# EAGLE board BluePill-Panel (EAGLE 9.6.2), part 1 of 2
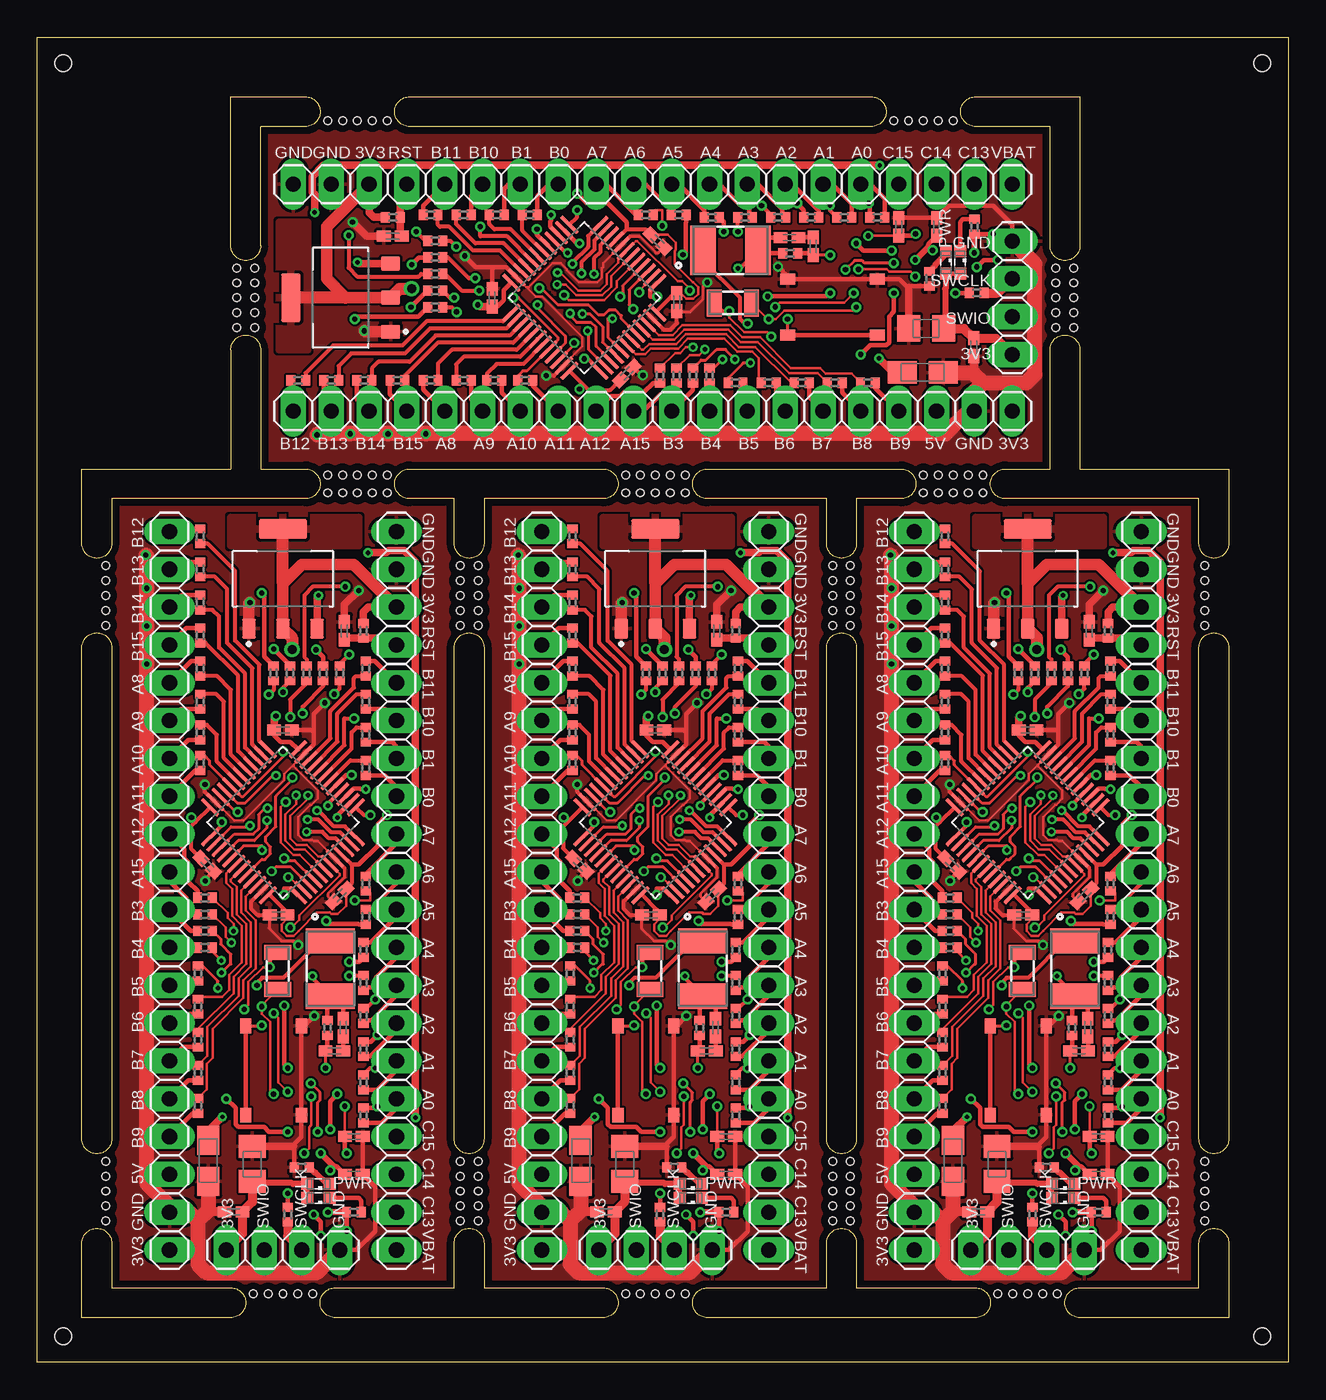
[diagram p0: board, top side]
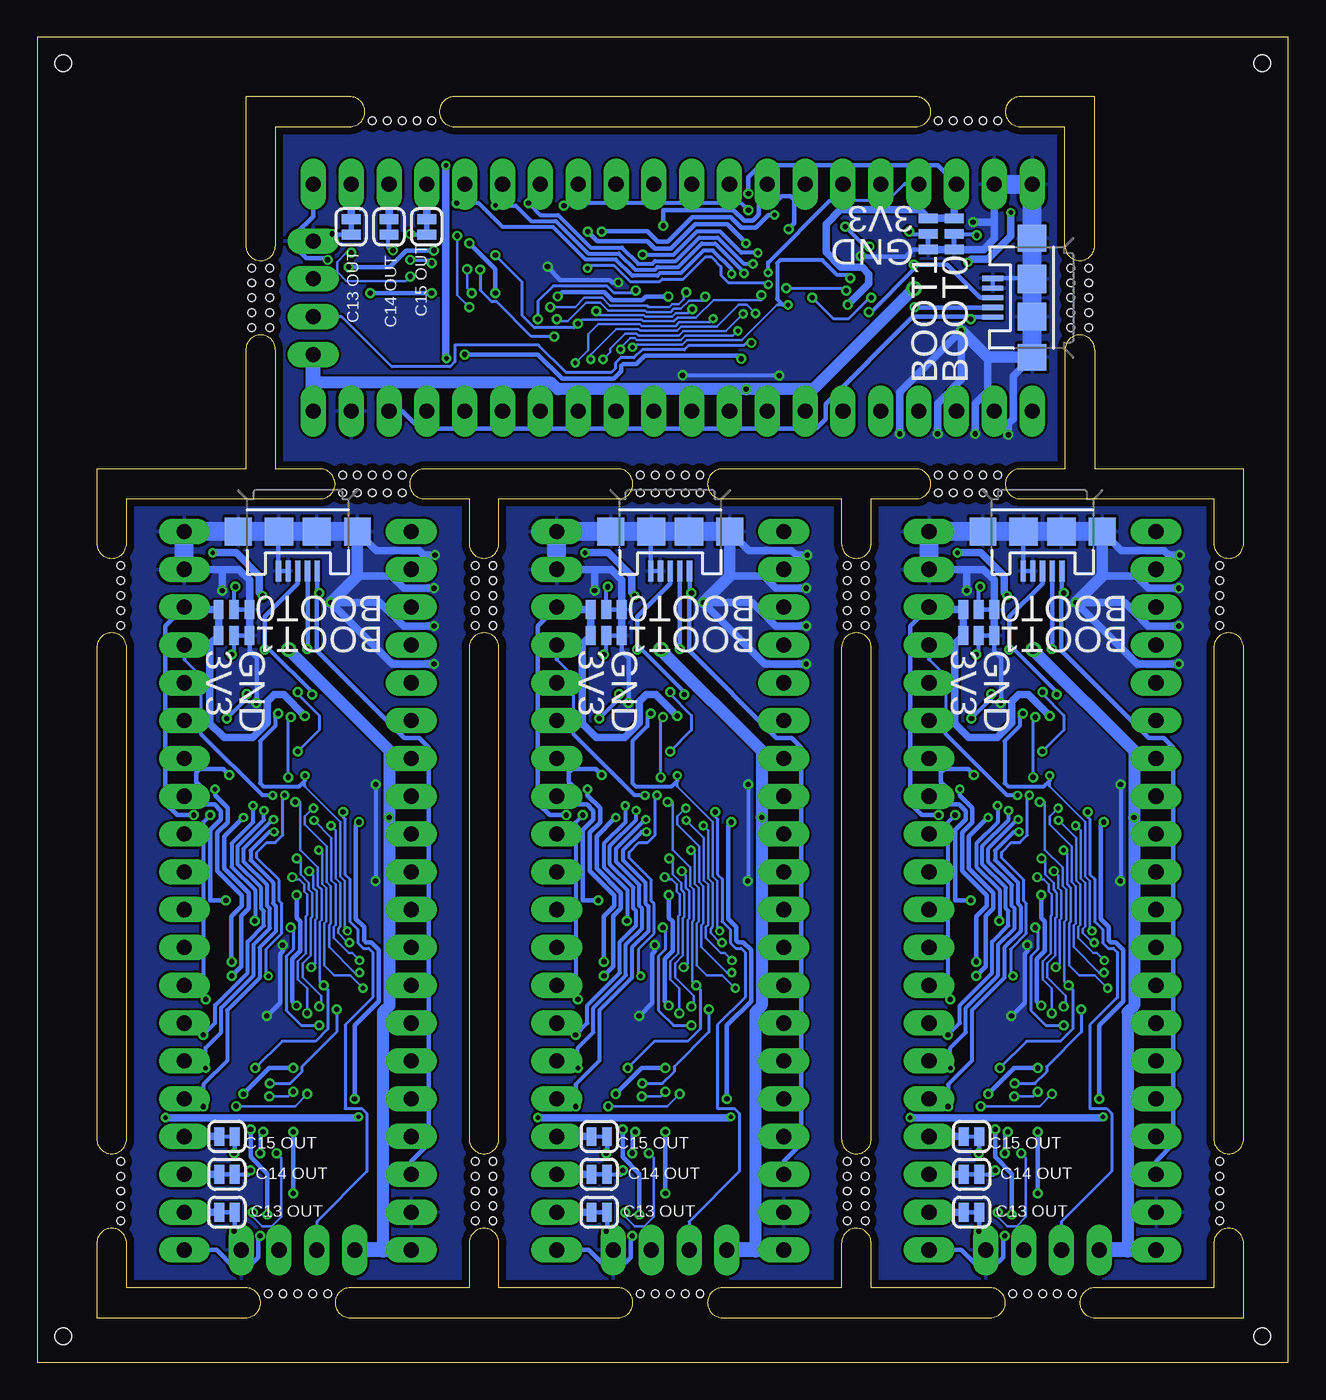
[diagram p1: board, bottom side, seen from below]

Size 84 x 89 mm. Coordinates in mm from the lower left corner, seen from the top.
Outline: 3,55 3,60 13,60 13,68 arc-180 15,68 15,60 18,60 arc-180 18,58 5,58 5,55 arc-180 3,55
Outline: 70,60 80,60 80,55 arc-180 78,55 78,58 65,58 arc-180 65,60 68,60 68,68 arc-180 70,68 70,60
Outline: 0,0 0,89 84,89 84,0 0,0
Outline: 3,48 arc-180 5,48 5,15 arc-180 3,15 3,48
Outline: 3,8 arc-180 5,8 5,5 13,5 arc-180 13,3 3,3 3,8
Outline: 25,83 arc-180 25,85 56,85 arc-180 56,83 25,83
Outline: 18,85 arc-180 18,83 15,83 15,75 arc-180 13,75 13,85 18,85
Outline: 63,83 arc-180 63,85 70,85 70,75 arc-180 68,75 68,83 63,83
Outline: 78,48 arc-180 80,48 80,15 arc-180 78,15 78,48
Outline: 78,8 arc-180 80,8 80,3 70,3 arc-180 70,5 78,5 78,8
Outline: 63,5 arc-180 63,3 45,3 arc-180 45,5 53,5 53,8 arc-180 55,8 55,5 63,5
Outline: 38,5 arc-180 38,3 20,3 arc-180 20,5 28,5 28,8 arc-180 30,8 30,5 38,5
Outline: 45,58 arc-180 45,60 58,60 arc-180 58,58 55,58 55,55 arc-180 53,55 53,58 45,58
Outline: 38,60 arc-180 38,58 30,58 30,55 arc-180 28,55 28,58 25,58 arc-180 25,60 38,60
Outline: 28,48 arc-180 30,48 30,15 arc-180 28,15 28,48
Outline: 53,48 arc-180 55,48 55,15 arc-180 53,15 53,48
Copper layers (1*16): Top 0.035mm / dielectric 1.5mm / Bottom 0.035mm
Design rules "rb": minimum track width 0.15mm, minimum drill 0.3mm, track to track 0.15mm, track to pad 0.15mm, pad to pad 0.15mm, via to via 0.15mm, smd to smd 0.15mm, copper to edge 0.5mm, drill to drill 0.5mm, minimum pad ring 0.16mm, minimum via ring 0.16mm, stop-mask expansion 0.1mm, vias tented up to drill 0.4mm, thermal gap 0.2mm
Holes 1.12 mm at 82.25,87.25 1.75,87.25 1.75,1.75 82.25,1.75
Holes 0.5 mm at 4.6,49.5 4.6,50.5 4.6,51.5 4.6,52.5 4.6,53.5 4.6,9.5 4.6,10.5 4.6,11.5 4.6,12.5 4.6,13.5 19.5,83.4 20.5,83.4 21.5,83.4 22.5,83.4 23.5,83.4 57.5,83.4 58.5,83.4 59.5,83.4 60.5,83.4 61.5,83.4 78.4,53.5 78.4,52.5 78.4,51.5 78.4,50.5 78.4,49.5 78.4,13.5 78.4,12.5 78.4,11.5 78.4,10.5 78.4,9.5 68.5,4.6 67.5,4.6 66.5,4.6 65.5,4.6 64.5,4.6 43.5,4.6 42.5,4.6 41.5,4.6 40.5,4.6 39.5,4.6 18.5,4.6 17.5,4.6 16.5,4.6 15.5,4.6 14.5,4.6 39.5,58.4 40.5,58.4 41.5,58.4 42.5,58.4 43.5,58.4 39.5,59.6 40.5,59.6 41.5,59.6 42.5,59.6 43.5,59.6 19.5,58.4 20.5,58.4 21.5,58.4 22.5,58.4 23.5,58.4 19.5,59.6 20.5,59.6 21.5,59.6 22.5,59.6 23.5,59.6 59.5,58.4 60.5,58.4 61.5,58.4 62.5,58.4 63.5,58.4 59.5,59.6 60.5,59.6 61.5,59.6 62.5,59.6 63.5,59.6 29.6,49.5 29.6,50.5 29.6,51.5 29.6,52.5 29.6,53.5 28.4,49.5 28.4,50.5 28.4,51.5 28.4,52.5 28.4,53.5 54.6,49.5 54.6,50.5 54.6,51.5 54.6,52.5 54.6,53.5 53.4,49.5 53.4,50.5 53.4,51.5 53.4,52.5 53.4,53.5 29.6,9.5 29.6,10.5 29.6,11.5 29.6,12.5 29.6,13.5 28.4,9.5 28.4,10.5 28.4,11.5 28.4,12.5 28.4,13.5 54.6,9.5 54.6,10.5 54.6,11.5 54.6,12.5 54.6,13.5 53.4,9.5 53.4,10.5 53.4,11.5 53.4,12.5 53.4,13.5 69.6,69.5 69.6,70.5 69.6,71.5 69.6,72.5 69.6,73.5 68.4,69.5 68.4,70.5 68.4,71.5 68.4,72.5 68.4,73.5 14.6,69.5 14.6,70.5 14.6,71.5 14.6,72.5 14.6,73.5 13.4,69.5 13.4,70.5 13.4,71.5 13.4,72.5 13.4,73.5

## Footprints (pad centres in the part's own frame; a part is rotated, then mirrored left to right if it is on the bottom)
SMT-JUMPER_3_1-NC_TRACE_NO-SILK = smd 0.66 x 1.27: 1 -1.041,0; 2 0,0; 3 1.041,0
C0402K = smd 0.925 x 0.74: 1 -0.6,0; 2 0.6,0
A/3216-18R = smd 1.95 x 1.5: + 1.375,0; - -1.375,0
R/2012-12R = smd 1.55 x 1.8: + 1.175,0; - -1.175,0
SML0603 = smd 0.8 x 0.8: A 0.75,0; C -0.75,0
USB-MICROB = smd 1.4 x 0.35: D+ -2.65,0; D- -2.65,-0.65; GND -2.65,1.3; ID -2.65,0.65; VBUS -2.65,-1.3 | smd 1.9 x 1.8: MT1 0,-4; MT2 0,4 | smd 1.9 x 1.9: P$1 0,-1.27; P$2 0,1.27
1X20 = drill 1.016 long: 1 -24.13,0; 2 -21.59,0; 3 -19.05,0; 4 -16.51,0; 5 -13.97,0; 6 -11.43,0; 7 -8.89,0; 8 -6.35,0; 9 -3.81,0; 10 -1.27,0; 11 1.27,0; 12 3.81,0; 13 6.35,0; 14 8.89,0; 15 11.43,0; 16 13.97,0; 17 16.51,0; 18 19.05,0; 19 21.59,0; 20 24.13,0
1X04 = drill 1.016 long: 1 -3.81,0; 2 -1.27,0; 3 1.27,0; 4 3.81,0
SMT-JUMPER_2_NC_TRACE_SILK = smd 0.66 x 1.27: 1 -0.521,0; 2 0.521,0
3.2X1.5 = smd 1 x 1.8: 1 -1.25,0; 2 1.25,0
5.0X3.2_2 = smd 1.7 x 3.3: 1 -1.85,0; 2 1.85,0
R0402 = smd 0.6 x 0.7: 1 -0.5,0; 2 0.5,0
QFP50P900X900X160-48N = smd 1.56 x 0.28: 1 -4.18,2.75; 2 -4.18,2.25; 3 -4.18,1.75; 4 -4.18,1.25; 5 -4.18,0.75; 6 -4.18,0.25; 7 -4.18,-0.25; 8 -4.18,-0.75; 9 -4.18,-1.25; 10 -4.18,-1.75; 11 -4.18,-2.25; 12 -4.18,-2.75; 25 4.18,-2.75; 26 4.18,-2.25; 27 4.18,-1.75; 28 4.18,-1.25; 29 4.18,-0.75; 30 4.18,-0.25; 31 4.18,0.25; 32 4.18,0.75; 33 4.18,1.25; 34 4.18,1.75; 35 4.18,2.25; 36 4.18,2.75 | smd 0.28 x 1.56: 13 -2.75,-4.18; 14 -2.25,-4.18; 15 -1.75,-4.18; 16 -1.25,-4.18; 17 -0.75,-4.18; 18 -0.25,-4.18; 19 0.25,-4.18; 20 0.75,-4.18; 21 1.25,-4.18; 22 1.75,-4.18; 23 2.25,-4.18; 24 2.75,-4.18; 37 2.75,4.18; 38 2.25,4.18; 39 1.75,4.18; 40 1.25,4.18; 41 0.75,4.18; 42 0.25,4.18; 43 -0.25,4.18; 44 -0.75,4.18; 45 -1.25,4.18; 46 -1.75,4.18; 47 -2.25,4.18; 48 -2.75,4.18
SOT229P700X180-4N = smd 0.93 x 1.31: 1 -2.29,-3.345; 2 0,-3.345; 3 2.29,-3.345 | smd 3.24 x 1.31: 4 0,3.345
TS-1187A-B-A-B = smd 1 x 0.75: A -3,1.875; B 3,1.875; C -3,-1.875; D 3,-1.875

## Placement (x,y rotation side)
BOOT0  JUMPER-SMT_3_1-NC_TRACE_NO-SILK  [SMT-JUMPER_3_1-NC_TRACE_NO-SILK]  20.79,50.56 0 bottom
BOOT1  JUMPER-SMT_3_1-NC_TRACE_NO-SILK  [SMT-JUMPER_3_1-NC_TRACE_NO-SILK]  20.79,48.81 0 bottom
BOOT2  JUMPER-SMT_3_1-NC_TRACE_NO-SILK  [SMT-JUMPER_3_1-NC_TRACE_NO-SILK]  45.79,50.56 0 bottom
BOOT3  JUMPER-SMT_3_1-NC_TRACE_NO-SILK  [SMT-JUMPER_3_1-NC_TRACE_NO-SILK]  45.79,48.81 0 bottom
BOOT4  JUMPER-SMT_3_1-NC_TRACE_NO-SILK  [SMT-JUMPER_3_1-NC_TRACE_NO-SILK]  70.79,50.56 0 bottom
BOOT5  JUMPER-SMT_3_1-NC_TRACE_NO-SILK  [SMT-JUMPER_3_1-NC_TRACE_NO-SILK]  70.79,48.81 0 bottom
BOOT6  JUMPER-SMT_3_1-NC_TRACE_NO-SILK  [SMT-JUMPER_3_1-NC_TRACE_NO-SILK]  22.44,75.79 270 bottom
BOOT7  JUMPER-SMT_3_1-NC_TRACE_NO-SILK  [SMT-JUMPER_3_1-NC_TRACE_NO-SILK]  24.18,75.79 270 bottom
C1  1uF  [C0402K]  20.63,49.13 90 top
C2  10uF  [A/3216-18R]  11.48,13.54 90 top
C3  22uF  [R/2012-12R]  14.44,13.32 270 top
C4  100nF  [C0402K]  16.5,42.47 180 top
C5  100nF  [C0402K]  16.2,30.06 0 top
C6  100nF  [C0402K]  20.31,31.35 45 top
C7  100nF  [C0402K]  11.42,33.42 135 top
C8  100nF  [C0402K]  13.18,10.12 0 top
C9  20pF  [C0402K]  19.96,20.91 180 top
C10  20pF  [C0402K]  20.54,22.49 270 top
C11  20pF  [C0402K]  21.26,12.62 180 top
C12  20pF  [C0402K]  21.26,15.16 0 top
C13  GREEN  [SML0603]  18.88,11.03 180 top
C14  1uF  [C0402K]  45.63,49.13 90 top
C15  22uF  [R/2012-12R]  39.44,13.32 270 top
C16  10uF  [A/3216-18R]  36.49,13.54 90 top
C17  100nF  [C0402K]  41.5,42.47 180 top
C18  100nF  [C0402K]  41.2,30.06 0 top
C19  100nF  [C0402K]  45.31,31.35 45 top
C20  100nF  [C0402K]  36.42,33.42 135 top
C21  100nF  [C0402K]  38.18,10.12 0 top
C22  20pF  [C0402K]  44.96,20.91 180 top
C23  20pF  [C0402K]  45.54,22.49 270 top
C24  20pF  [C0402K]  46.26,12.62 180 top
C25  20pF  [C0402K]  46.26,15.16 0 top
C26  GREEN  [SML0603]  43.88,11.03 180 top
C27  1uF  [C0402K]  70.63,49.13 90 top
C28  22uF  [R/2012-12R]  64.44,13.32 270 top
C29  10uF  [A/3216-18R]  61.48,13.54 90 top
C30  100nF  [C0402K]  66.5,42.47 180 top
C31  100nF  [C0402K]  66.2,30.06 0 top
C32  100nF  [C0402K]  70.31,31.35 45 top
C33  100nF  [C0402K]  61.42,33.42 135 top
C34  100nF  [C0402K]  63.18,10.12 0 top
C35  20pF  [C0402K]  69.96,20.91 180 top
C36  20pF  [C0402K]  70.54,22.49 270 top
C37  20pF  [C0402K]  71.26,12.62 180 top
C38  20pF  [C0402K]  71.26,15.16 0 top
C39  GREEN  [SML0603]  68.88,11.03 180 top
C40  1uF  [C0402K]  23.87,75.63 180 top
C41  22uF  [R/2012-12R]  59.68,69.44 0 top
C42  10uF  [A/3216-18R]  59.46,66.49 180 top
C43  100nF  [C0402K]  30.54,71.5 270 top
C44  100nF  [C0402K]  42.94,71.2 90 top
C45  100nF  [C0402K]  41.65,75.31 135 top
C46  100nF  [C0402K]  39.58,66.42 225 top
C47  100nF  [C0402K]  62.88,68.18 90 top
C48  20pF  [C0402K]  52.09,74.96 270 top
C49  20pF  [C0402K]  50.51,75.54 0 top
C50  20pF  [C0402K]  60.38,76.26 270 top
C51  20pF  [C0402K]  57.84,76.26 90 top
C52  GREEN  [SML0603]  61.97,73.88 270 top
J1  [USB-MICROB]  16.5,55.8 90 bottom
J2  [USB-MICROB]  41.5,55.8 90 bottom
J3  [USB-MICROB]  66.5,55.8 90 bottom
J4  [USB-MICROB]  17.2,71.5 0 bottom
JP1  [1X20]  8.88,31.67 90 top
JP2  [1X20]  24.12,31.67 90 top
JP3  [1X04]  16.5,7.54 0 top
JP4  JUMPER-SMT_2_NC_TRACE_SILK  [SMT-JUMPER_2_NC_TRACE_SILK]  21.26,10.08 180 bottom
JP5  [1X20]  33.88,31.67 90 top
JP6  [1X20]  49.12,31.67 90 top
JP7  JUMPER-SMT_2_NC_TRACE_SILK  [SMT-JUMPER_2_NC_TRACE_SILK]  21.26,12.62 180 bottom
JP8  JUMPER-SMT_2_NC_TRACE_SILK  [SMT-JUMPER_2_NC_TRACE_SILK]  21.26,15.16 180 bottom
JP9  [1X04]  41.5,7.54 0 top
JP10  JUMPER-SMT_2_NC_TRACE_SILK  [SMT-JUMPER_2_NC_TRACE_SILK]  46.26,10.08 180 bottom
JP11  JUMPER-SMT_2_NC_TRACE_SILK  [SMT-JUMPER_2_NC_TRACE_SILK]  46.26,12.62 180 bottom
JP12  JUMPER-SMT_2_NC_TRACE_SILK  [SMT-JUMPER_2_NC_TRACE_SILK]  46.26,15.16 180 bottom
JP13  [1X20]  58.88,31.67 90 top
JP14  [1X20]  74.12,31.67 90 top
JP15  [1X04]  66.5,7.54 0 top
JP16  JUMPER-SMT_2_NC_TRACE_SILK  [SMT-JUMPER_2_NC_TRACE_SILK]  71.26,10.08 180 bottom
JP17  JUMPER-SMT_2_NC_TRACE_SILK  [SMT-JUMPER_2_NC_TRACE_SILK]  71.26,12.62 180 bottom
JP18  JUMPER-SMT_2_NC_TRACE_SILK  [SMT-JUMPER_2_NC_TRACE_SILK]  71.26,15.16 180 bottom
JP19  [1X20]  41.33,63.88 180 top
JP20  [1X20]  41.33,79.12 180 top
JP21  [1X04]  65.46,71.5 90 top
JP22  JUMPER-SMT_2_NC_TRACE_SILK  [SMT-JUMPER_2_NC_TRACE_SILK]  62.92,76.26 90 bottom
JP23  JUMPER-SMT_2_NC_TRACE_SILK  [SMT-JUMPER_2_NC_TRACE_SILK]  60.38,76.26 90 bottom
JP24  JUMPER-SMT_2_NC_TRACE_SILK  [SMT-JUMPER_2_NC_TRACE_SILK]  57.84,76.26 90 bottom
PWR  RED  [SML0603]  18.88,11.98 180 top
PWR1  RED  [SML0603]  43.88,11.98 180 top
PWR2  RED  [SML0603]  68.88,11.98 180 top
PWR3  RED  [SML0603]  61.02,73.88 270 top
Q1  32.768kHz  [3.2X1.5]  16.15,26.29 90 top
Q2  8MHz  [5.0X3.2_2]  19.68,26.45 90 top
Q3  32.768kHz  [3.2X1.5]  41.15,26.29 90 top
Q4  8MHz  [5.0X3.2_2]  44.68,26.45 90 top
Q5  32.768kHz  [3.2X1.5]  66.15,26.29 90 top
Q6  8MHz  [5.0X3.2_2]  69.68,26.45 90 top
Q7  32.768kHz  [3.2X1.5]  46.71,71.15 180 top
Q8  8MHz  [5.0X3.2_2]  46.55,74.68 180 top
R1  220  [R0402]  22.06,39.92 270 top
R2  220  [R0402]  22.06,42.15 270 top
R3  10k  [R0402]  21.9,49.13 270 top
R4  220  [R0402]  11.26,28.97 180 top
R5  220  [R0402]  11.26,27.86 180 top
R6  220  [R0402]  10.79,26.11 270 top
R7  220  [R0402]  10.79,23.89 270 top
R8  220  [R0402]  10.79,21.67 270 top
R9  220  [R0402]  10.79,19.45 270 top
R10  220  [R0402]  10.79,17.22 270 top
R11  220  [R0402]  22.06,44.37 270 top
R12  220  [R0402]  22.06,46.59 90 top
R13  220  [R0402]  10.94,55.48 90 top
R14  220  [R0402]  10.94,53.26 90 top
R15  220  [R0402]  10.94,51.04 90 top
R16  220  [R0402]  10.94,48.81 90 top
R17  220  [R0402]  21.9,16.59 90 top
R18  220  [R0402]  21.9,18.81 90 top
R19  220  [R0402]  21.9,21.03 90 top
R20  220  [R0402]  21.9,23.26 90 top
R21  220  [R0402]  21.9,25.48 90 top
R22  220  [R0402]  21.9,27.7 270 top
R23  220  [R0402]  22.06,29.92 270 top
R24  220  [R0402]  22.06,32.15 270 top
R25  220  [R0402]  10.94,46.59 270 top
R26  220  [R0402]  10.94,44.37 90 top
R27  220  [R0402]  10.94,42.31 90 top
R28  220  [R0402]  10.94,40.24 90 top
R29  220  [R0402]  11.26,31.19 0 top
R30  1M  [R0402]  19.48,22.45 270 top
R31  220  [R0402]  16.82,9.92 90 top
R32  220  [R0402]  11.26,30.08 0 top
R33  100k  [R0402]  18.09,46.27 90 top
R34  100k  [R0402]  20.31,46.27 270 top
R35  20  [R0402]  19.2,46.27 90 top
R36  20  [R0402]  16.98,46.27 90 top
R37  4k7  [R0402]  15.87,46.27 90 top
R38  1k  [R0402]  17.77,13.1 180 top
R39  1k  [R0402]  21.26,10.08 180 top
R40  220  [R0402]  47.06,39.92 270 top
R41  220  [R0402]  47.06,42.15 270 top
R42  220  [R0402]  36.26,28.97 180 top
R43  220  [R0402]  36.26,27.86 180 top
R44  220  [R0402]  35.79,26.11 270 top
R45  220  [R0402]  35.79,23.89 270 top
R46  220  [R0402]  35.79,21.67 270 top
R47  220  [R0402]  35.79,19.45 270 top
R48  220  [R0402]  35.79,17.22 270 top
R49  220  [R0402]  47.06,44.37 270 top
R50  220  [R0402]  47.06,46.59 90 top
R51  220  [R0402]  35.95,55.48 90 top
R52  220  [R0402]  35.95,53.26 90 top
R53  220  [R0402]  35.95,51.04 90 top
R54  220  [R0402]  35.95,48.81 90 top
R55  220  [R0402]  46.9,16.59 90 top
R56  220  [R0402]  46.9,18.81 90 top
R57  220  [R0402]  46.9,21.03 90 top
R58  220  [R0402]  46.9,23.26 90 top
R59  220  [R0402]  46.9,25.48 90 top
R60  220  [R0402]  46.9,27.7 270 top
R61  220  [R0402]  47.06,29.92 270 top
R62  220  [R0402]  47.06,32.15 270 top
R63  220  [R0402]  35.95,46.59 270 top
R64  220  [R0402]  35.95,44.37 90 top
R65  220  [R0402]  35.95,42.31 90 top
R66  220  [R0402]  35.95,40.24 90 top
R67  220  [R0402]  36.26,31.19 0 top
R68  220  [R0402]  41.82,9.92 90 top
R69  220  [R0402]  36.26,30.08 0 top
R70  100k  [R0402]  43.09,46.27 90 top
R71  100k  [R0402]  45.31,46.27 270 top
R72  10k  [R0402]  46.9,49.13 270 top
R73  20  [R0402]  44.2,46.27 90 top
R74  20  [R0402]  41.98,46.27 90 top
R75  4k7  [R0402]  40.87,46.27 90 top
R76  1M  [R0402]  44.48,22.45 270 top
R77  1k  [R0402]  42.77,13.1 180 top
R78  1k  [R0402]  46.26,10.08 180 top
R79  220  [R0402]  72.06,39.92 270 top
R80  220  [R0402]  72.06,42.15 270 top
R81  220  [R0402]  61.26,28.97 180 top
R82  220  [R0402]  61.26,27.86 180 top
R83  220  [R0402]  60.79,26.11 270 top
R84  220  [R0402]  60.79,23.89 270 top
R85  220  [R0402]  60.79,21.67 270 top
R86  220  [R0402]  60.79,19.45 270 top
R87  220  [R0402]  60.79,17.22 270 top
R88  220  [R0402]  72.06,44.37 270 top
R89  220  [R0402]  72.06,46.59 90 top
R90  220  [R0402]  60.94,55.48 90 top
R91  220  [R0402]  60.94,53.26 90 top
R92  220  [R0402]  60.94,51.04 90 top
R93  220  [R0402]  60.94,48.81 90 top
R94  220  [R0402]  71.9,16.59 90 top
R95  220  [R0402]  71.9,18.81 90 top
R96  220  [R0402]  71.9,21.03 90 top
R97  220  [R0402]  71.9,23.26 90 top
R98  220  [R0402]  71.9,25.48 90 top
R99  220  [R0402]  71.9,27.7 270 top
R100  220  [R0402]  72.06,29.92 270 top
R101  220  [R0402]  72.06,32.15 270 top
R102  220  [R0402]  60.94,46.59 270 top
R103  220  [R0402]  60.94,44.37 90 top
R104  220  [R0402]  60.94,42.31 90 top
R105  220  [R0402]  60.94,40.24 90 top
R106  220  [R0402]  61.26,31.19 0 top
R107  220  [R0402]  66.82,9.92 90 top
R108  220  [R0402]  61.26,30.08 0 top
R109  100k  [R0402]  68.09,46.27 90 top
R110  100k  [R0402]  70.31,46.27 270 top
R111  10k  [R0402]  71.9,49.13 270 top
R112  20  [R0402]  69.2,46.27 90 top
R113  20  [R0402]  66.98,46.27 90 top
R114  4k7  [R0402]  65.87,46.27 90 top
R115  1M  [R0402]  69.48,22.45 270 top
R116  1k  [R0402]  67.77,13.1 180 top
R117  1k  [R0402]  71.26,10.08 180 top
R118  220  [R0402]  33.08,77.06 0 top
R119  220  [R0402]  30.85,77.06 0 top
R120  220  [R0402]  44.03,66.26 270 top
R121  220  [R0402]  45.14,66.26 270 top
R122  220  [R0402]  46.89,65.79 0 top
R123  220  [R0402]  49.11,65.79 0 top
R124  220  [R0402]  51.33,65.79 0 top
R125  220  [R0402]  53.55,65.79 0 top
R126  220  [R0402]  55.78,65.79 0 top
R127  220  [R0402]  28.63,77.06 0 top
R128  220  [R0402]  26.41,77.06 180 top
R129  220  [R0402]  17.52,65.95 180 top
R130  220  [R0402]  19.74,65.95 180 top
R131  220  [R0402]  21.96,65.95 180 top
R132  220  [R0402]  24.18,65.95 180 top
R133  220  [R0402]  56.41,76.9 180 top
R134  220  [R0402]  54.19,76.9 180 top
R135  220  [R0402]  51.97,76.9 180 top
R136  220  [R0402]  49.74,76.9 180 top
R137  220  [R0402]  47.52,76.9 180 top
R138  220  [R0402]  45.3,76.9 0 top
R139  220  [R0402]  43.08,77.06 0 top
R140  220  [R0402]  40.85,77.06 0 top
R141  220  [R0402]  26.41,65.95 0 top
R142  220  [R0402]  28.63,65.95 180 top
R143  220  [R0402]  30.69,65.95 180 top
R144  220  [R0402]  32.76,65.95 180 top
R145  220  [R0402]  41.81,66.26 90 top
R146  220  [R0402]  63.08,71.82 180 top
R147  220  [R0402]  42.92,66.26 90 top
R148  100k  [R0402]  26.73,73.09 180 top
R149  100k  [R0402]  26.73,75.31 0 top
R150  10k  [R0402]  23.87,76.9 0 top
R151  20  [R0402]  26.73,74.2 180 top
R152  20  [R0402]  26.73,71.98 180 top
R153  4k7  [R0402]  26.73,70.87 180 top
R154  1M  [R0402]  50.55,74.48 0 top
R155  1k  [R0402]  59.9,72.77 270 top
R156  1k  [R0402]  62.92,76.26 270 top
U1  STM32F103C8T6  [QFP50P900X900X160-48N]  16.5,36.26 135 top
U2  AMS1117-3.3  [SOT229P700X180-4N]  16.5,52.62 0 top
U3  STM32F103C8T6  [QFP50P900X900X160-48N]  41.5,36.26 135 top
U4  AMS1117-3.3  [SOT229P700X180-4N]  41.5,52.62 0 top
U5  STM32F103C8T6  [QFP50P900X900X160-48N]  66.5,36.26 135 top
U6  AMS1117-3.3  [SOT229P700X180-4N]  66.5,52.62 0 top
U7  STM32F103C8T6  [QFP50P900X900X160-48N]  36.74,71.5 225 top
U8  AMS1117-3.3  [SOT229P700X180-4N]  20.38,71.5 90 top
U$1  TACTILE-SWITCH  [TS-1187A-B-A-B]  15.87,19.61 90 top
U$2  TACTILE-SWITCH  [TS-1187A-B-A-B]  40.87,19.61 90 top
U$3  TACTILE-SWITCH  [TS-1187A-B-A-B]  65.87,19.61 90 top
U$4  TACTILE-SWITCH  [TS-1187A-B-A-B]  53.4,70.87 180 top

## Library data of the parts
BOOT0 BOOT1-BOOT7 JP4 JP7 JP8 JP10-JP12 JP16-JP18 JP22-JP24 = SparkFun-Jumpers
C1 C6-C12 C14 C19-C25 C27 C32-C38 C40 C45-C51 = rcl; LCSC: C52923; SPICEPREFIX: C
C2 C16 C29 C42 = rcl; LCSC: C7171; SPICEPREFIX: C
C3 C15 C28 C41 = rcl; LCSC: C147776; SPICEPREFIX: C
C4 C5 C17 C18 C30 C31 C43 C44 = rcl; LCSC: C1525; SPICEPREFIX: C
C13 C26 C39 C52 = led; LCSC: C72043
J1-J4 = SparkFun-Connectors; PROD_ID: CONN-09505; SF_ID: PRT-08533
JP1-JP3 JP5 JP6 JP9 JP13-JP15 JP19-JP21 = pinhead
PWR PWR1-PWR3 = led; LCSC: C2286
Q1 Q3 Q5 Q7 = crystal-geyer_V1_0; LCSC: C32346
Q2 Q4 Q6 Q8 = crystal-geyer_V1_0; LCSC: C115962
R1 R2 R4-R29 R31 R32 R40-R69 R79-R108 R118-R147 = rcl; LCSC: C25091; SPICEPREFIX: R
R3 R72 R111 R150 = rcl; LCSC: C25744; SPICEPREFIX: R
R30 R76 R115 R154 = rcl; LCSC: C26083; SPICEPREFIX: R
R33 R34 R70 R71 R109 R110 R148 R149 = rcl; LCSC: C25741; SPICEPREFIX: R
R35 R36 R73 R74 R112 R113 R151 R152 = rcl; LCSC: C4109; SPICEPREFIX: R
R37 R75 R114 R153 = rcl; LCSC: C25900; SPICEPREFIX: R
R38 R39 R77 R78 R116 R117 R155 R156 = rcl; LCSC: C11702; SPICEPREFIX: R
U1 U3 U5 U7 = STM32F103C8T6; AVAILABILITY: Good; DESCRIPTION: ARM® Cortex®-M3 STM32F1 Microcontroller IC 32-Bit 72MHz 64KB (64K x 8) FLASH 48-LQFP (7x7); DIGIKEY-PURCHASE-URL: https://snapeda.com/shop?store=DigiKey&id=52195; LCSC: C8734; MF: STMicroelectronics; MOUSER-PURCHASE-URL: https://snapeda.com/shop?store=Mouser&id=52195; MP: STM32F103C8T6; PACKAGE: LQFP-48 STMicroelectronics; PRICE: None
U2 U4 U6 U8 = AMS1117-3.3; AVAILABILITY: Unavailable; DESCRIPTION: Sot223/Pkg 1-Amp 3.3-Volt Low Drop Out Voltage Regulatator; LCSC: C6186; MF: Advanced Monolithic Systems; MP: AMS1117-3.3; PACKAGE: None; PRICE: None
U$1-U$4 = tactile; LCSC: C318884

## Nets
+3V1: BOOT2.1 BOOT3.1 C15.+ C17.2 C18.2 C19.2 C20.2 C21.2 C26.A JP5.1 JP6.18 JP9.1 PWR1.A R72.1 U3.9 U3.24 U3.36 U3.48 U4.2 U4.4
+3V2: BOOT4.1 BOOT5.1 C28.+ C30.2 C31.2 C32.2 C33.2 C34.2 C39.A JP13.1 JP14.18 JP15.1 PWR2.A R111.1 U5.9 U5.24 U5.36 U5.48 U6.2 U6.4
+3V3: BOOT0.1 BOOT1.1 C3.+ C4.2 C5.2 C6.2 C7.2 C8.2 C13.A JP1.1 JP2.18 JP3.1 PWR.A R3.1 U1.9 U1.24 U1.36 U1.48 U2.2 U2.4
+3V4: BOOT6.1 BOOT7.1 C41.+ C43.2 C44.2 C45.2 C46.2 C47.2 C52.A JP19.1 JP20.18 JP21.1 PWR3.A R150.1 U7.9 U7.24 U7.36 U7.48 U8.2 U8.4
+5V: J1.VBUS JP1.3 R37.2
+5V1: J2.VBUS JP5.3 R75.2
+5V2: J3.VBUS JP13.3 R114.2
+5V3: J4.VBUS JP19.3 R153.2
A0: JP2.5 R17.1
A1: JP2.6 R18.1
A2: JP2.7 R19.1
A3: JP2.8 R20.1
A4: JP2.9 R21.1
A5: JP2.10 R22.1
A6: JP2.11 R23.1
A7: JP2.12 R24.1
A8: JP1.16 R25.1
A9: JP1.15 R26.1
A10: JP1.14 R27.1
A11: JP1.13 R28.1
A12: JP1.12 R29.1
A13: JP6.5 R55.1
A14: JP6.7 R57.1
A15: JP1.11 R32.1
A16: JP6.9 R59.1
A17: JP6.11 R61.1
A18: JP5.16 R63.1
A19: JP5.14 R65.1
A20: JP5.12 R67.1
A21: JP6.6 R56.1
A22: JP6.8 R58.1
A23: JP6.10 R60.1
A24: JP6.12 R62.1
A25: JP5.15 R64.1
A26: JP5.13 R66.1
A27: JP5.11 R69.1
A28: JP14.5 R94.1
A29: JP14.7 R96.1
A30: JP14.9 R98.1
A31: JP14.11 R100.1
A32: JP13.16 R102.1
A33: JP13.14 R104.1
A34: JP13.12 R106.1
A35: JP14.6 R95.1
A36: JP14.8 R97.1
A37: JP14.10 R99.1
A38: JP14.12 R101.1
A39: JP13.15 R103.1
A40: JP13.13 R105.1
A41: JP13.11 R108.1
A42: JP20.5 R133.1
A43: JP20.7 R135.1
A44: JP20.9 R137.1
A45: JP20.11 R139.1
A46: JP19.16 R141.1
A47: JP19.14 R143.1
A48: JP19.12 R145.1
A49: JP20.6 R134.1
A50: JP20.8 R136.1
A51: JP20.10 R138.1
A52: JP20.12 R140.1
A53: JP19.15 R142.1
A54: JP19.13 R144.1
A55: JP19.11 R147.1
B0: JP2.13 R1.2
B1: JP2.14 R2.2
B2: JP6.13 R40.2
B3: JP1.10 R4.2
B4: JP1.9 R5.2
B5: JP1.8 R6.2
B6: JP1.7 R7.2
B7: JP1.6 R8.2
B8: JP1.5 R9.2
B9: JP1.4 R10.2
B10: JP2.15 R11.2
B11: JP2.16 R12.2
B12: JP1.20 R13.2
B13: JP1.19 R14.2
B14: JP1.18 R15.2
B15: JP1.17 R16.2
B16: JP6.14 R41.2
B17: JP5.10 R42.2
B18: JP5.9 R43.2
B19: JP5.7 R45.2
B20: JP5.8 R44.2
B21: JP5.6 R46.2
B22: JP5.5 R47.2
B23: JP6.15 R49.2
B24: JP5.4 R48.2
B25: JP5.20 R51.2
B26: JP6.16 R50.2
B27: JP5.19 R52.2
B28: JP5.18 R53.2
B29: JP5.17 R54.2
B30: JP14.13 R79.2
B31: JP14.14 R80.2
B32: JP13.10 R81.2
B33: JP13.9 R82.2
B34: JP13.7 R84.2
B35: JP13.8 R83.2
B36: JP13.6 R85.2
B37: JP13.5 R86.2
B38: JP14.15 R88.2
B39: JP13.4 R87.2
B40: JP13.20 R90.2
B41: JP14.16 R89.2
B42: JP13.19 R91.2
B43: JP13.18 R92.2
B44: JP13.17 R93.2
B45: JP20.13 R118.2
B46: JP20.14 R119.2
B47: JP19.10 R120.2
B48: JP19.9 R121.2
B49: JP19.7 R123.2
B50: JP19.8 R122.2
B51: JP19.6 R124.2
B52: JP19.5 R125.2
B53: JP20.15 R127.2
B54: JP19.4 R126.2
B55: JP19.20 R129.2
B56: JP20.16 R128.2
B57: JP19.19 R130.2
B58: JP19.18 R131.2
B59: JP19.17 R132.2
BOOT0: R33.1 U1.44
BOOT1: R34.2 U1.20
BOOT2: R70.1 U3.44
BOOT3: R71.2 U3.20
BOOT4: R109.1 U5.44
BOOT5: R110.2 U5.20
BOOT6: R148.1 U7.44
BOOT7: R149.2 U7.20
C1: JP6.4 JP12.2
C2: JP6.2 JP10.2
C3: JP6.3 JP11.2
C4: JP14.4 JP18.2
C5: JP14.2 JP16.2
C6: JP14.3 JP17.2
C7: JP20.4 JP24.2
C8: JP20.2 JP22.2
C9: JP20.3 JP23.2
C13: JP2.2 JP4.2
C14: JP2.3 JP7.2
C15: JP2.4 JP8.2
GND: BOOT0.3 BOOT1.3 C1.2 C2.- C3.- C4.1 C5.1 C6.1 C7.1 C8.1 C11.1 C12.2 J1.GND J1.ID J1.MT1 J1.MT2 J1.P$1 J1.P$2 JP1.2 JP2.19 JP2.20 JP3.4 R38.2 U1.8 U1.23 U1.35 U1.47 U2.1 U$1.C U$1.D
GND1: BOOT2.3 BOOT3.3 C14.2 C15.- C16.- C17.1 C18.1 C19.1 C20.1 C21.1 C24.1 C25.2 J2.GND J2.ID J2.MT1 J2.MT2 J2.P$1 J2.P$2 JP5.2 JP6.19 JP6.20 JP9.4 R77.2 U3.8 U3.23 U3.35 U3.47 U4.1 U$2.C U$2.D
GND2: BOOT4.3 BOOT5.3 C27.2 C28.- C29.- C30.1 C31.1 C32.1 C33.1 C34.1 C37.1 C38.2 J3.GND J3.ID J3.MT1 J3.MT2 J3.P$1 J3.P$2 JP13.2 JP14.19 JP14.20 JP15.4 R116.2 U5.8 U5.23 U5.35 U5.47 U6.1 U$3.C U$3.D
GND3: BOOT6.3 BOOT7.3 C40.2 C41.- C42.- C43.1 C44.1 C45.1 C46.1 C47.1 C50.1 C51.2 J4.GND J4.ID J4.MT1 J4.MT2 J4.P$1 J4.P$2 JP19.2 JP20.19 JP20.20 JP21.4 R155.2 U7.8 U7.23 U7.35 U7.47 U8.1 U$4.C U$4.D
N$1: BOOT0.2 R33.2
N$2: BOOT1.2 R34.1
N$3: R1.1 U1.18
N$4: R2.1 U1.19
N$5: C9.1 C10.2
N$6: R4.1 U1.39
N$7: R5.1 U1.40
N$8: R6.1 U1.41
N$9: R7.1 U1.42
N$10: R8.1 U1.43
N$11: R9.1 U1.45
N$12: R10.1 U1.46
N$13: R11.1 U1.21
N$14: R12.1 U1.22
N$15: R13.1 U1.25
N$16: R14.1 U1.26
N$17: R15.1 U1.27
N$18: R16.1 U1.28
N$19: PWR.C R38.1
N$20: C13.C R39.1
N$21: R40.1 U3.18
N$22: R41.1 U3.19
N$23: R42.1 U3.39
N$24: R43.1 U3.40
N$25: J1.D- R36.2
N$26: R17.2 U1.10
N$27: R18.2 U1.11
N$28: R19.2 U1.12
N$29: R20.2 U1.13
N$30: R21.2 U1.14
N$31: R22.2 U1.15
N$32: R23.2 U1.16
N$33: R24.2 U1.17
N$34: R25.2 U1.29
N$35: R26.2 U1.30
N$36: R27.2 U1.31
N$37: R44.1 U3.41
N$38: R45.1 U3.42
N$39: R46.1 U3.43
N$40: R31.2 U1.37
N$41: R32.2 U1.38
N$42: R47.1 U3.45
N$43: R48.1 U3.46
N$44: R49.1 U3.21
N$45: J1.D+ R35.2 R37.1
N$46: R50.1 U3.22
N$47: R51.1 U3.25
N$48: R52.1 U3.26
N$49: R53.1 U3.27
N$50: R54.1 U3.28
N$51: R55.2 U3.10
N$52: R56.2 U3.11
N$53: R57.2 U3.12
N$54: R58.2 U3.13
N$55: R59.2 U3.14
N$56: R60.2 U3.15
N$57: R61.2 U3.16
N$58: R62.2 U3.17
N$59: R63.2 U3.29
N$60: R64.2 U3.30
N$61: R65.2 U3.31
N$62: R68.2 U3.37
N$63: R69.2 U3.38
N$64: BOOT2.2 R70.2
N$65: BOOT3.2 R71.1
N$66: J2.D- R74.2
N$67: J2.D+ R73.2 R75.1
N$68: C22.1 C23.2
N$69: PWR1.C R77.1
N$70: C26.C R78.1
N$71: R79.1 U5.18
N$72: R80.1 U5.19
N$73: R81.1 U5.39
N$74: R82.1 U5.40
N$75: R83.1 U5.41
N$76: R84.1 U5.42
N$77: R85.1 U5.43
N$78: R86.1 U5.45
N$79: R87.1 U5.46
N$80: R88.1 U5.21
N$81: R89.1 U5.22
N$82: R90.1 U5.25
N$83: R91.1 U5.26
N$84: R92.1 U5.27
N$85: R93.1 U5.28
N$86: R94.2 U5.10
N$87: R95.2 U5.11
N$88: R96.2 U5.12
N$89: R97.2 U5.13
N$90: R98.2 U5.14
N$91: R99.2 U5.15
N$92: R100.2 U5.16
N$93: R101.2 U5.17
N$94: R102.2 U5.29
N$95: R103.2 U5.30
N$96: R104.2 U5.31
N$97: R107.2 U5.37
N$98: R108.2 U5.38
N$99: BOOT4.2 R109.2
N$100: BOOT5.2 R110.1
N$101: J3.D- R113.2
N$102: J3.D+ R112.2 R114.1
N$103: C35.1 C36.2
N$104: PWR2.C R116.1
N$105: C39.C R117.1
N$106: R118.1 U7.18
N$107: R119.1 U7.19
N$108: R120.1 U7.39
N$109: R121.1 U7.40
N$110: R122.1 U7.41
N$111: R123.1 U7.42
N$112: R124.1 U7.43
N$113: R125.1 U7.45
N$114: R126.1 U7.46
N$115: R127.1 U7.21
N$116: R128.1 U7.22
N$117: R129.1 U7.25
N$118: R130.1 U7.26
N$119: R131.1 U7.27
N$120: R132.1 U7.28
N$121: R133.2 U7.10
N$122: R134.2 U7.11
N$123: R135.2 U7.12
N$124: R136.2 U7.13
N$125: R137.2 U7.14
N$126: R138.2 U7.15
N$127: R139.2 U7.16
N$128: R140.2 U7.17
N$129: R141.2 U7.29
N$130: R142.2 U7.30
N$131: R143.2 U7.31
N$132: R146.2 U7.37
N$133: R147.2 U7.38
N$134: BOOT6.2 R148.2
N$135: BOOT7.2 R149.1
N$136: J4.D- R152.2
N$137: J4.D+ R151.2 R153.1
N$138: C48.1 C49.2
N$139: PWR3.C R155.1
N$140: C52.C R156.1
PA1: R66.2 R74.1 U3.32
PA2: R67.2 R73.1 U3.33
PA3: R105.2 R113.1 U5.32
PA4: R106.2 R112.1 U5.33
PA5: R144.2 R152.1 U7.32
PA6: R145.2 R151.1 U7.33
PA11: R28.2 R36.1 U1.32
PA12: R29.2 R35.1 U1.33
PC1: JP10.1 R78.2 U3.2
PC2: C24.2 JP11.1 Q3.2 U3.3
PC3: C25.1 JP12.1 Q3.1 U3.4
PC4: JP16.1 R117.2 U5.2
PC5: C37.2 JP17.1 Q5.2 U5.3
PC6: C38.1 JP18.1 Q5.1 U5.4
PC7: JP22.1 R156.2 U7.2
PC8: C50.2 JP23.1 Q7.2 U7.3
PC9: C51.1 JP24.1 Q7.1 U7.4
PC13: JP4.1 R39.2 U1.2
PC14: C11.2 JP7.1 Q1.2 U1.3
PC15: C12.1 JP8.1 Q1.1 U1.4
PD0: C9.2 Q2.2 R30.2 U1.5
PD1: C10.1 Q2.1 R30.1 U1.6
PD2: C22.2 Q4.2 R76.2 U3.5
PD3: C23.1 Q4.1 R76.1 U3.6
PD4: C35.2 Q6.2 R115.2 U5.5
PD5: C36.1 Q6.1 R115.1 U5.6
PD6: C48.2 Q8.2 R154.2 U7.5
PD7: C49.1 Q8.1 R154.1 U7.6
RESET: C1.1 JP2.17 R3.2 U1.7 U$1.A U$1.B
RESET1: C14.1 JP6.17 R72.2 U3.7 U$2.A U$2.B
RESET2: C27.1 JP14.17 R111.2 U5.7 U$3.A U$3.B
RESET3: C40.1 JP20.17 R150.2 U7.7 U$4.A U$4.B
SWCLK: JP3.3 R31.1
SWCLK1: JP9.3 R68.1
SWCLK2: JP15.3 R107.1
SWCLK3: JP21.3 R146.1
SWIO: JP3.2 U1.34
SWIO1: JP9.2 U3.34
SWIO2: JP15.2 U5.34
SWIO3: JP21.2 U7.34
VBAT: JP2.1 U1.1
VBAT1: JP6.1 U3.1
VBAT2: JP14.1 U5.1
VBAT3: JP20.1 U7.1
VCC: C2.+ U2.3
VCC1: C16.+ U4.3
VCC2: C29.+ U6.3
VCC3: C42.+ U8.3

## Tracks (layer width: path | path; a pad name or v marks a point on that pad's centre or on a via)
+3V1  (via drill 0.35, 0.6)
  Top 0.152: C18.2 41.8,29.8 41.43,29.43 41.43,28.96 41.76,28.63 42.22,28.63 42.55,28.96 42.55,28.99 43.77,30.21 44.64,30.21 44.73,30.11 45.18,30.11 45.74,30.67 C19.2
  Top 0.203: 35.61,36.29 35.61,36.33 v35.36,36.59
  Top 0.254: U3.9 46.11,33.43 46.11,32.15 C19.2 | U3.48 40.65,31.36 41.61,30.4 41.49,30.4 41.49,30.38 C18.2 | U3.36 35.61,36.29 35.31,35.98 35.31,34.53 C20.2 | C15.+ 39.54,12.04
  Top 0.305: U3.24 42.01,41.67 41.34,41.67 40.9,42.11 C17.2 | PWR1.A C26.A | 46.11,33.43 46.59,33.43 47.85,34.69 47.85,36.12 v48.48,36.75
  Top 0.406: PWR1.A 42.16,11.98 42.1,12.04 39.54,12.04
  Top 0.508: R72.1 46.9,50.4 47.22,50.72 JP6.18 | C17.2 40.9,43.29 v41.03,43.42
  Top 0.61: C15.+ 39.44,10.78 C21.2 38.78,8.63 JP9.1
  Top 0.762: U4.2 41.5,52.31 42.77,53.58 46.27,53.58 JP6.18
  Top 0.813: U4.2 42.11,48.67 v42.11,47.87 | 41.5,52.31 U4.4
  Bottom 0.305: v48.48,36.75 49.6,36.75 50.39,37.54 50.39,49.45 JP6.18
  Bottom 0.508: JP6.18 48.96,50.56 BOOT2.1 BOOT3.1 47.4,48.24 47.4,42.91 46.45,41.96 44.55,41.96 43.57,42.94 43.57,44.38 43.1,44.85 42.45,44.85 v41.03,43.42
  Bottom 0.813: v42.11,47.87 41.92,47.67 41.92,47.65 35.36,41.09 v35.36,36.59 35.36,23.95 35.79,23.52 35.79,7.54
  Bottom 1.016: JP5.1 35.79,7.54 JP9.1
  pour Top: 38.01,54.85 46.58,54.85 46.58,56.75 38.01,56.75
+3V2  (via drill 0.35, 0.6)
  Top 0.152: C31.2 66.8,29.8 66.43,29.43 66.43,28.96 66.76,28.63 67.22,28.63 67.55,28.96 67.55,28.99 68.77,30.21 69.64,30.21 69.73,30.11 70.18,30.11 70.73,30.67 C32.2
  Top 0.203: 60.61,36.29 60.61,36.33 v60.36,36.59
  Top 0.254: U5.9 71.11,33.43 71.11,32.15 C32.2 | U5.48 65.65,31.36 66.61,30.4 66.48,30.4 66.48,30.38 C31.2 | U5.36 60.61,36.29 60.31,35.98 60.31,34.53 C33.2 | C28.+ 64.54,12.04
  Top 0.305: U5.24 67,41.67 66.34,41.67 65.9,42.11 C30.2 | PWR2.A C39.A | 71.11,33.43 71.59,33.43 72.85,34.69 72.85,36.12 v73.48,36.75
  Top 0.406: PWR2.A 67.16,11.98 67.1,12.04 64.54,12.04
  Top 0.508: R111.1 71.9,50.4 72.22,50.72 JP14.18 | C30.2 65.9,43.29 v66.03,43.42
  Top 0.61: C28.+ 64.44,10.78 C34.2 63.78,8.63 JP15.1
  Top 0.762: U6.2 66.5,52.31 67.77,53.58 71.26,53.58 JP14.18
  Top 0.813: U6.2 67.11,48.67 v67.11,47.87 | 66.5,52.31 U6.4
  Bottom 0.305: v73.48,36.75 74.6,36.75 75.39,37.54 75.39,49.45 JP14.18
  Bottom 0.508: JP14.18 73.96,50.56 BOOT4.1 BOOT5.1 72.4,48.24 72.4,42.91 71.45,41.96 69.55,41.96 68.56,42.94 68.56,44.38 68.1,44.85 67.45,44.85 v66.03,43.42
  Bottom 0.813: v67.11,47.87 66.92,47.67 66.92,47.65 60.36,41.09 v60.36,36.59 60.36,23.95 60.79,23.52 60.79,7.54
  Bottom 1.016: JP13.1 60.79,7.54 JP15.1
  pour Top: 63.01,54.85 71.58,54.85 71.58,56.75 63.01,56.75
+3V3  (via drill 0.35, 0.6)
  Top 0.152: C5.2 16.8,29.8 16.43,29.43 16.43,28.96 16.76,28.63 17.22,28.63 17.55,28.96 17.55,28.99 18.77,30.21 19.64,30.21 19.73,30.11 20.18,30.11 20.73,30.67 C6.2
  Top 0.203: 10.61,36.29 10.61,36.33 v10.36,36.59
  Top 0.254: U1.9 21.11,33.43 21.11,32.15 C6.2 | U1.48 15.65,31.36 16.61,30.4 16.48,30.4 16.48,30.38 C5.2 | U1.36 10.61,36.29 10.31,35.98 10.31,34.53 C7.2 | C3.+ 14.54,12.04
  Top 0.305: U1.24 17,41.67 16.34,41.67 15.9,42.11 C4.2 | PWR.A C13.A | 21.11,33.43 21.59,33.43 22.85,34.69 22.85,36.12 v23.48,36.75
  Top 0.406: PWR.A 17.16,11.98 17.1,12.04 14.54,12.04
  Top 0.508: R3.1 21.9,50.4 22.22,50.72 JP2.18 | C4.2 15.9,43.29 v16.02,43.42
  Top 0.61: C3.+ 14.44,10.78 C8.2 13.78,8.63 JP3.1
  Top 0.762: U2.2 16.5,52.31 17.77,53.58 21.26,53.58 JP2.18
  Top 0.813: U2.2 17.11,48.67 v17.11,47.87 | 16.5,52.31 U2.4
  Bottom 0.305: v23.48,36.75 24.6,36.75 25.39,37.54 25.39,49.45 JP2.18
  Bottom 0.508: JP2.18 23.96,50.56 BOOT0.1 BOOT1.1 22.4,48.24 22.4,42.91 21.45,41.96 19.55,41.96 18.56,42.94 18.56,44.38 18.1,44.85 17.45,44.85 v16.02,43.42
  Bottom 0.813: v17.11,47.87 16.92,47.67 16.92,47.65 10.36,41.09 v10.36,36.59 10.36,23.95 10.79,23.52 10.79,7.54
  Bottom 1.016: JP1.1 10.79,7.54 JP3.1
  pour Top: 13.01,54.85 21.58,54.85 21.58,56.75 13.01,56.75
+3V4  (via drill 0.35, 0.6)
  Top 0.152: C44.2 43.2,71.8 43.57,71.43 44.04,71.43 44.37,71.76 44.37,72.22 44.04,72.55 44.01,72.55 42.79,73.77 42.79,74.64 42.89,74.73 42.89,75.18 42.33,75.74 C45.2
  Top 0.203: 36.71,65.62 36.67,65.62 v36.41,65.36
  Top 0.254: U7.9 39.57,76.11 40.85,76.11 C45.2 | U7.48 41.64,70.65 42.6,71.61 42.6,71.49 42.62,71.49 C44.2 | U7.36 36.71,65.62 37.02,65.31 38.47,65.31 C46.2 | C41.+ 60.96,69.54
  Top 0.305: U7.24 31.33,72 31.33,71.34 30.89,70.9 C43.2 | PWR3.A C52.A | 39.57,76.11 39.57,76.59 38.31,77.85 36.88,77.85 v36.25,78.48
  Top 0.406: PWR3.A 61.02,72.16 60.96,72.11 60.96,69.54
  Top 0.508: R150.1 22.6,76.9 22.28,77.22 JP20.18 | C43.2 29.71,70.9 v29.58,71.03
  Top 0.61: C41.+ 62.23,69.44 C47.2 64.37,68.78 JP21.1
  Top 0.762: U8.2 20.69,71.5 19.42,72.77 19.42,76.27 JP20.18
  Top 0.813: U8.2 24.33,72.11 v25.13,72.11 | 20.69,71.5 U8.4
  Bottom 0.305: v36.25,78.48 36.25,79.6 35.46,80.39 23.55,80.39 JP20.18
  Bottom 0.508: JP20.18 22.44,78.96 BOOT6.1 BOOT7.1 24.76,77.4 30.09,77.4 31.04,76.45 31.04,74.55 30.06,73.57 28.62,73.57 28.15,73.1 28.15,72.45 v29.58,71.03
  Bottom 0.813: v25.13,72.11 25.33,71.92 25.35,71.92 31.91,65.36 v36.41,65.36 49.05,65.36 49.48,65.79 65.46,65.79
  Bottom 1.016: JP19.1 65.46,65.79 JP21.1
  pour Top: 18.15,68.01 18.15,76.58 16.25,76.58 16.25,68.01
+5V  (via drill 0.35)
  Top 0.305: R37.2 15.23,47.41 15.23,51.51 v15.07,51.67
  Bottom 0.305: J1.VBUS 15.2,51.8 v15.07,51.67 15.23,51.51 15.23,47.8 9.36,41.93 8.35,41.93 7.71,41.3 7.71,14.68 8.88,13.51 JP1.3
+5V1  (via drill 0.35)
  Top 0.305: R75.2 40.23,47.41 40.23,51.51 v40.07,51.67
  Bottom 0.305: J2.VBUS 40.2,51.8 v40.07,51.67 40.23,51.51 40.23,47.8 34.36,41.93 33.35,41.93 32.72,41.3 32.72,14.68 33.88,13.51 JP5.3
+5V2  (via drill 0.35)
  Top 0.305: R114.2 65.23,47.41 65.23,51.51 v65.07,51.67
  Bottom 0.305: J3.VBUS 65.2,51.8 v65.07,51.67 65.23,51.51 65.23,47.8 59.36,41.93 58.35,41.93 57.72,41.3 57.72,14.68 58.88,13.51 JP13.3
+5V3  (via drill 0.35)
  Top 0.305: R153.2 25.59,70.23 21.49,70.23 v21.33,70.07
  Bottom 0.305: J4.VBUS 21.2,70.2 v21.33,70.07 21.49,70.23 25.2,70.23 31.07,64.37 31.07,63.35 31.7,62.72 58.32,62.72 59.49,63.88 JP19.3
A0
  Top 0.305: R17.1 23.14,16.09 24.12,17.06 JP2.5
A1
  Top 0.305: R18.1 22.83,18.31 24.12,19.61 JP2.6
A2
  Top 0.305: R19.1 22.35,20.53 24.12,22.3 JP2.7
A3
  Top 0.305: R20.1 22.12,22.97 22.46,22.97 24.12,24.63 JP2.8
A4
  Top 0.305: JP2.9 24.12,27.2 22.73,25.81 22.73,25.48 22.45,25.2 22.12,25.2 R21.1
A5
  Top 0.305: R22.1 22.4,28.2 24.12,29.92 JP2.10
A6
  Top 0.254: R23.1 22.4,30.42 24.12,32.15 JP2.11
A7
  Top 0.305: JP2.12 24.12,34.84 22.06,32.78 R24.1 | R24.1
A8
  Top 0.305: R25.1 10.33,47.09 JP1.16
A9
  Top 0.305: R26.1 9.65,43.87 JP1.15
A10
  Top 0.305: R27.1 10.13,41.81 JP1.14
A11
  Top 0.305: R28.1 10.6,39.74 JP1.13
A12
  Top 0.305: R29.1 10.76,31.65 10.15,32.27 10.15,33.58 9.88,33.85 9.88,34.48 JP1.12
A13
  Top 0.305: R55.1 48.15,16.09 49.12,17.06 JP6.5
A14
  Top 0.305: R57.1 47.35,20.53 49.12,22.3 JP6.7
A15
  Top 0.305: JP1.11 8.88,32.3 10.04,31.15 10.04,30.59 10.54,30.08 R32.1
A16
  Top 0.305: JP6.9 49.12,27.2 47.73,25.81 47.73,25.48 47.45,25.2 47.12,25.2 R59.1
A17
  Top 0.254: R61.1 47.4,30.42 49.12,32.15 JP6.11
A18
  Top 0.305: R63.1 35.34,47.09 JP5.16
A19
  Top 0.305: R65.1 35.13,41.81 JP5.14
A20
  Top 0.305: R67.1 35.76,31.65 35.15,32.27 35.15,33.58 34.88,33.85 34.88,34.48 JP5.12
A21
  Top 0.305: R56.1 47.83,18.31 49.12,19.61 JP6.6
A22
  Top 0.305: R58.1 47.12,22.97 47.47,22.97 49.12,24.63 JP6.8
A23
  Top 0.305: R60.1 47.4,28.2 49.12,29.92 JP6.10
A24
  Top 0.305: JP6.12 49.12,34.84 47.06,32.78 R62.1 | R62.1
A25
  Top 0.305: R64.1 34.65,43.87 JP5.15
A26
  Top 0.305: R66.1 35.61,39.74 JP5.13
A27
  Top 0.305: JP5.11 33.88,32.3 35.04,31.15 35.04,30.59 35.54,30.08 R69.1
A28
  Top 0.305: R94.1 73.14,16.09 74.12,17.06 JP14.5
A29
  Top 0.305: R96.1 72.35,20.53 74.12,22.3 JP14.7
A30
  Top 0.305: JP14.9 74.12,27.2 72.73,25.81 72.73,25.48 72.45,25.2 72.12,25.2 R98.1
A31
  Top 0.254: R100.1 72.4,30.42 74.12,32.15 JP14.11
A32
  Top 0.305: R102.1 60.33,47.09 JP13.16
A33
  Top 0.305: R104.1 60.13,41.81 JP13.14
A34
  Top 0.305: R106.1 60.76,31.65 60.15,32.27 60.15,33.58 59.88,33.85 59.88,34.48 JP13.12
A35
  Top 0.305: R95.1 72.83,18.31 74.12,19.61 JP14.6
A36
  Top 0.305: R97.1 72.12,22.97 72.46,22.97 74.12,24.63 JP14.8
A37
  Top 0.305: R99.1 72.4,28.2 74.12,29.92 JP14.10
A38
  Top 0.305: JP14.12 74.12,34.84 72.06,32.78 R101.1 | R101.1
A39
  Top 0.305: R103.1 59.65,43.87 JP13.15
A40
  Top 0.305: R105.1 60.6,39.74 JP13.13
A41
  Top 0.305: JP13.11 58.88,32.3 60.04,31.15 60.04,30.59 60.54,30.08 R108.1
A42
  Top 0.305: R133.1 56.91,78.15 55.94,79.12 JP20.5
A43
  Top 0.305: R135.1 52.47,77.35 50.7,79.12 JP20.7
A44
  Top 0.305: JP20.9 45.8,79.12 47.19,77.73 47.52,77.73 47.8,77.45 47.8,77.12 R137.1
A45
  Top 0.254: R139.1 42.58,77.4 40.85,79.12 JP20.11
A46
  Top 0.305: R141.1 25.91,65.34 JP19.16
A47
  Top 0.305: R143.1 31.19,65.13 JP19.14
A48
  Top 0.305: R145.1 41.35,65.76 40.73,65.15 39.42,65.15 39.15,64.88 38.52,64.88 JP19.12
A49
  Top 0.305: R134.1 54.69,77.83 53.4,79.12 JP20.6
A50
  Top 0.305: R136.1 50.03,77.12 50.03,77.47 48.37,79.12 JP20.8
A51
  Top 0.305: R138.1 44.8,77.4 43.08,79.12 JP20.10
A52
  Top 0.305: JP20.12 38.16,79.12 40.22,77.06 R140.1 | R140.1
A53
  Top 0.305: R142.1 29.13,64.65 JP19.15
A54
  Top 0.305: R144.1 33.26,65.6 JP19.13
A55
  Top 0.305: JP19.11 40.7,63.88 41.85,65.04 42.41,65.04 42.92,65.54 R147.1
B0
  Top 0.305: JP2.13 24.12,38.63 23.33,39.42 R1.2
B1
  Top 0.305: R2.2 23.83,41.65 24.12,41.35 JP2.14
B2
  Top 0.305: JP6.13 49.12,38.63 48.33,39.42 R40.2
B3
  Top 0.305: R4.2 10.31,28.97 JP1.10
B4
  Top 0.305: R5.2 JP1.9
B5
  Top 0.305: R6.2 9.18,25.61 JP1.8
B6
  Top 0.305: R7.2 9.49,23.39 JP1.7
B7
  Top 0.305: R8.2 9.81,21.17 JP1.6
B8
  Top 0.305: R9.2 10.13,18.95 JP1.5
B9
  Top 0.305: R10.2 10.45,16.72 JP1.4
B10
  Top 0.305: R11.2 23.35,43.87 JP2.15
B11
  Top 0.305: R12.2 22.67,47.09 JP2.16
B12
  Top 0.305: R13.2 9.06,55.98 JP1.20
B13
  Top 0.305: R14.2 9.38,53.76 JP1.19
B14
  Top 0.305: R15.2 9.7,51.54 JP1.18
B15
  Top 0.305: R16.2 10.02,49.31 JP1.17
B16
  Top 0.305: R41.2 48.83,41.65 49.12,41.35 JP6.14
B17
  Top 0.305: R42.2 35.31,28.97 JP5.10
B18
  Top 0.305: R43.2 JP5.9
B19
  Top 0.305: R45.2 34.49,23.39 JP5.7
B20
  Top 0.305: R44.2 34.18,25.61 JP5.8
B21
  Top 0.305: R46.2 34.81,21.17 JP5.6
B22
  Top 0.305: R47.2 35.13,18.95 JP5.5
B23
  Top 0.305: R49.2 48.35,43.87 JP6.15
B24
  Top 0.305: R48.2 35.45,16.72 JP5.4
B25
  Top 0.305: R51.2 34.06,55.98 JP5.20
B26
  Top 0.305: R50.2 47.67,47.09 JP6.16
B27
  Top 0.305: R52.2 34.38,53.76 JP5.19
B28
  Top 0.305: R53.2 34.7,51.54 JP5.18
B29
  Top 0.305: R54.2 35.02,49.31 JP5.17
B30
  Top 0.305: JP14.13 74.12,38.63 73.33,39.42 R79.2
B31
  Top 0.305: R80.2 73.83,41.65 74.12,41.35 JP14.14
B32
  Top 0.305: R81.2 60.31,28.97 JP13.10
B33
  Top 0.305: R82.2 JP13.9
B34
  Top 0.305: R84.2 59.49,23.39 JP13.7
B35
  Top 0.305: R83.2 59.17,25.61 JP13.8
B36
  Top 0.305: R85.2 59.81,21.17 JP13.6
B37
  Top 0.305: R86.2 60.13,18.95 JP13.5
B38
  Top 0.305: R88.2 73.35,43.87 JP14.15
B39
  Top 0.305: R87.2 60.45,16.72 JP13.4
B40
  Top 0.305: R90.2 59.06,55.98 JP13.20
B41
  Top 0.305: R89.2 72.67,47.09 JP14.16
B42
  Top 0.305: R91.2 59.38,53.76 JP13.19
B43
  Top 0.305: R92.2 59.7,51.54 JP13.18
B44
  Top 0.305: R93.2 60.02,49.31 JP13.17
B45
  Top 0.305: JP20.13 34.37,79.12 33.58,78.33 R118.2
B46
  Top 0.305: R119.2 31.35,78.83 31.65,79.12 JP20.14
B47
  Top 0.305: R120.2 44.03,65.31 JP19.10
B48
  Top 0.305: R121.2 JP19.9
B49
  Top 0.305: R123.2 49.61,64.49 JP19.7
B50
  Top 0.305: R122.2 47.39,64.18 JP19.8
B51
  Top 0.305: R124.2 51.83,64.81 JP19.6
B52
  Top 0.305: R125.2 54.05,65.13 JP19.5
B53
  Top 0.305: R127.2 29.13,78.35 JP20.15
B54
  Top 0.305: R126.2 56.28,65.45 JP19.4
B55
  Top 0.305: R129.2 17.02,64.06 JP19.20
B56
  Top 0.305: R128.2 25.91,77.67 JP20.16
B57
  Top 0.305: R130.2 19.24,64.38 JP19.19
B58
  Top 0.305: R131.2 21.46,64.7 JP19.18
B59
  Top 0.305: R132.2 23.68,65.02 JP19.17
BOOT0  (via drill 0.35)
  Top 0.203: U1.44 15.08,33.78 15.31,33.78 15.31,33.81 15.66,34.16 15.66,34.62 15.33,34.95 15.33,35.3 16.02,35.98 16.02,38.03 17.14,39.16 | v17.14,39.29 17.14,39.16 | 17.14,39.16
  Top 0.254: R33.1 18.09,45.62 16.98,44.51 v16.98,43.33
  Bottom 0.203: v17.14,39.29 17.14,43.17 v16.98,43.33
BOOT1  (via drill 0.35)
  Top 0.254: U1.20 20.63,41.45 20.63,43.25 v21.27,43.25 | v19.93,44.87 20.31,45.25 R34.2
  Bottom 0.254: v21.27,43.25 19.93,44.59 v19.93,44.87
BOOT2  (via drill 0.35)
  Top 0.203: U3.44 40.09,33.78 40.31,33.78 40.31,33.81 40.66,34.16 40.66,34.62 40.34,34.95 40.34,35.3 41.02,35.98 41.02,38.03 42.14,39.16 | v42.14,39.29 42.14,39.16 | 42.14,39.16
  Top 0.254: R70.1 43.09,45.62 41.98,44.51 v41.98,43.33
  Bottom 0.203: v42.14,39.29 42.14,43.17 v41.98,43.33
BOOT3  (via drill 0.35)
  Top 0.254: U3.20 45.63,41.45 45.63,43.25 v46.27,43.25 | v44.94,44.87 45.31,45.25 R71.2
  Bottom 0.254: v46.27,43.25 44.94,44.59 v44.94,44.87
BOOT4  (via drill 0.35)
  Top 0.203: U5.44 65.08,33.78 65.31,33.78 65.31,33.81 65.66,34.16 65.66,34.62 65.33,34.95 65.33,35.3 66.02,35.98 66.02,38.03 67.14,39.16 | v67.14,39.29 67.14,39.16 | 67.14,39.16
  Top 0.254: R109.1 68.09,45.62 66.98,44.51 v66.98,43.33
  Bottom 0.203: v67.14,39.29 67.14,43.17 v66.98,43.33
BOOT5  (via drill 0.35)
  Top 0.254: U5.20 70.63,41.45 70.63,43.25 v71.27,43.25 | v69.93,44.87 70.31,45.25 R110.2
  Bottom 0.254: v71.27,43.25 69.93,44.59 v69.93,44.87
BOOT6  (via drill 0.35)
  Top 0.203: U7.44 39.22,70.08 39.22,70.31 39.19,70.31 38.84,70.66 38.38,70.66 38.05,70.33 37.7,70.33 37.02,71.02 34.97,71.02 33.84,72.14 v33.71,72.14
  Top 0.254: R148.1 27.38,73.09 28.49,71.98 v29.67,71.98
  Bottom 0.203: v33.71,72.14 29.82,72.14 v29.67,71.98
BOOT7  (via drill 0.35)
  Top 0.254: U7.20 31.55,75.63 29.75,75.63 v29.75,76.27 | v28.13,74.94 27.75,75.31 R149.2
  Bottom 0.254: v29.75,76.27 28.41,74.94 v28.13,74.94
C1
  Bottom 0.508: JP12.2 JP6.4
C2
  Bottom 0.508: JP10.2 JP6.2
C3
  Bottom 0.508: JP11.2 JP6.3
C4
  Bottom 0.508: JP18.2 JP14.4
C5
  Bottom 0.508: JP16.2 JP14.2
C6
  Bottom 0.508: JP17.2 JP14.3
C7
  Bottom 0.508: JP24.2 JP20.4
C8
  Bottom 0.508: JP22.2 JP20.2
C9
  Bottom 0.508: JP23.2 JP20.3
C13
  Bottom 0.508: JP4.2 JP2.2
C14
  Bottom 0.508: JP7.2 JP2.3
C15
  Bottom 0.508: JP8.2 JP2.4
GND  (via drill 0.35)
  Top 0.152: U1.35 12,37.63 13.24,36.39 13.86,36.39 16.58,39.11 16.58,39.52 17.21,40.16 | 17.21,40.16 U1.23 | 17.21,40.16 17.21,40.01 18.82,38.4 18.82,37.86 18.41,37.45 18.34,37.45 17.54,36.64 17.54,35.41 17.87,35.09 18.48,35.09 18.56,35 18.82,35 U1.8
  Top 0.203: 20.63,33.2 20.63,32.55 19.52,31.44 19.52,31.3 C6.1 | v17.53,28.02 17.25,28.3 16.41,28.3 15.56,29.15 15.56,30.02
  Top 0.254: U1.8 20.63,33.2 | U1.47 14.35,30.93 14.35,30.49 14.78,30.06 C5.1 | U1.35 11.26,38.32 v11.26,38.81 | 11.29,32.43 C7.1 | v11.29,32.33 11.29,32.43 | 11.29,32.43
  Top 0.305: U1.23 18.56,41.51 18.56,42.31 | 18.56,42.31 18.41,42.47 C4.1 | JP3.4 21.42,7.54 22.69,8.81 22.69,11.79 C11.1 C12.2 | R38.2 17.27,14.44 17.33,14.49 | 17.11,14.49 17.74,15.13 U$1.C U$1.D 17.93,22.61 v18.59,23.26 | 18.56,42.31 18.56,43.55 v19.3,44.29 | C5.1 15.56,30.02
  Top 0.508: C1.2 20.63,50.88 v21.58,51.83 | C3.- 17.11,14.49
  Top 0.61: C8.1 11.55,10.12 11.48,10.18
  Top 0.762: U2.1 14.21,50.97 v14.28,51.04
  Top 1.016: 10.79,9.49 10.19,10.08 JP1.2 8.88,10.47 7.36,11.99 v7.36,46.91 v7.36,49.45 v7.36,51.99 7.36,54.15 v7.29,54.21 | 10.79,9.49 10.79,6.59 11.36,6.02 18.79,6.02 JP3.4 | C2.- 11.48,10.18 10.79,9.49
  Bottom 0.254: v11.29,32.33 11.26,32.36 v11.26,38.81
  Bottom 0.305: J1.P$2 17.8,55.77 J1.GND J1.ID | v19.3,44.29 19.3,44.55 19.27,44.59 19.27,47.3 19.75,47.77 BOOT1.3 | v17.53,28.02 17.53,27.6 17.69,27.43 17.69,24.13 18.56,23.26 v18.59,23.26
  Bottom 0.508: 21.74,53.26 21.58,53.1 v21.58,51.83 | 21.74,53.26 JP2.19 | BOOT1.3 BOOT0.3 19.75,52.54 20.47,53.26 21.74,53.26 | v7.29,54.21 8.04,54.21 8.36,54.53 11.23,54.53 J1.MT1 | 12.5,52.81 10.23,52.81 9.41,51.99 v7.36,51.99 | v7.36,49.45 9.41,49.45 10.99,51.04 v14.28,51.04 10.15,46.91 v7.36,46.91
  Bottom 0.762: v14.28,51.04 12.5,52.81 J1.MT1
  Bottom 1.27: J1.MT1 J1.P$1 J1.P$2 J1.MT2 JP2.20 JP2.19
  pour Top (rank 2): 4.75,58.18 28.25,58.18 28.25,4.84 4.75,4.84
  pour Bottom: 4.59,58.34 28.41,58.34 28.41,4.68 4.59,4.68
GND1  (via drill 0.35)
  Top 0.152: U3.35 37,37.63 38.24,36.39 38.86,36.39 41.58,39.11 41.58,39.52 42.22,40.16 | 42.22,40.16 U3.23 | 42.22,40.16 42.22,40.01 43.82,38.4 43.82,37.86 43.41,37.45 43.34,37.45 42.54,36.64 42.54,35.41 42.87,35.09 43.48,35.09 43.57,35 43.82,35 U3.8
  Top 0.203: 45.63,33.2 45.63,32.55 44.52,31.44 44.52,31.3 C19.1 | v42.53,28.02 42.26,28.3 41.42,28.3 40.56,29.15 40.56,30.02
  Top 0.254: U3.8 45.63,33.2 | U3.47 39.35,30.93 39.35,30.49 39.78,30.06 C18.1 | U3.35 36.26,38.32 v36.26,38.81 | 36.29,32.43 C20.1 | v36.29,32.33 36.29,32.43 | 36.29,32.43
  Top 0.305: U3.23 43.57,41.51 43.57,42.31 | 43.57,42.31 43.41,42.47 C17.1 | JP9.4 46.42,7.54 47.69,8.81 47.69,11.79 C24.1 C25.2 | R77.2 42.27,14.44 42.33,14.49 | 42.11,14.49 42.74,15.13 U$2.C U$2.D 42.93,22.61 v43.59,23.26 | 43.57,42.31 43.57,43.55 v44.3,44.29 | C18.1 40.56,30.02
  Top 0.508: C14.2 45.63,50.88 v46.58,51.83 | C15.- 42.11,14.49
  Top 0.61: C21.1 36.55,10.12 36.49,10.18
  Top 0.762: U4.1 39.21,50.97 v39.28,51.04
  Top 1.016: 35.79,9.49 35.19,10.08 JP5.2 33.88,10.47 32.36,11.99 v32.36,46.91 v32.36,49.45 v32.36,51.99 32.36,54.15 v32.3,54.21 | 35.79,9.49 35.79,6.59 36.36,6.02 43.79,6.02 JP9.4 | C16.- 36.49,10.18 35.79,9.49
  Bottom 0.254: v36.29,32.33 36.26,32.36 v36.26,38.81
  Bottom 0.305: J2.P$2 42.8,55.77 J2.GND J2.ID | v44.3,44.29 44.3,44.55 44.27,44.59 44.27,47.3 44.75,47.77 BOOT3.3 | v42.53,28.02 42.53,27.6 42.69,27.43 42.69,24.13 43.56,23.26 v43.59,23.26
  Bottom 0.508: 46.74,53.26 46.58,53.1 v46.58,51.83 | 46.74,53.26 JP6.19 | BOOT3.3 BOOT2.3 44.75,52.54 45.47,53.26 46.74,53.26 | v32.3,54.21 33.04,54.21 33.36,54.53 36.23,54.53 J2.MT1 | 37.5,52.81 35.23,52.81 34.41,51.99 v32.36,51.99 | v32.36,49.45 34.41,49.45 35.99,51.04 v39.28,51.04 35.15,46.91 v32.36,46.91
  Bottom 0.762: v39.28,51.04 37.5,52.81 J2.MT1
  Bottom 1.27: J2.MT1 J2.P$1 J2.P$2 J2.MT2 JP6.20 JP6.19
  pour Top (rank 2): 29.75,58.18 53.25,58.18 53.25,4.84 29.75,4.84
  pour Bottom: 29.6,58.34 53.41,58.34 53.41,4.68 29.6,4.68
GND2  (via drill 0.35)
  Top 0.152: U5.35 62,37.63 63.24,36.39 63.86,36.39 66.58,39.11 66.58,39.52 67.22,40.16 | 67.22,40.16 U5.23 | 67.22,40.16 67.22,40.01 68.82,38.4 68.82,37.86 68.41,37.45 68.34,37.45 67.54,36.64 67.54,35.41 67.87,35.09 68.48,35.09 68.56,35 68.82,35 U5.8
  Top 0.203: 70.63,33.2 70.63,32.55 69.52,31.44 69.52,31.3 C32.1 | v67.53,28.02 67.25,28.3 66.41,28.3 65.56,29.15 65.56,30.02
  Top 0.254: U5.8 70.63,33.2 | U5.47 64.35,30.93 64.35,30.49 64.78,30.06 C31.1 | U5.35 61.26,38.32 v61.26,38.81 | 61.29,32.43 C33.1 | v61.29,32.33 61.29,32.43 | 61.29,32.43
  Top 0.305: U5.23 68.56,41.51 68.56,42.31 | 68.56,42.31 68.41,42.47 C30.1 | JP15.4 71.42,7.54 72.69,8.81 72.69,11.79 C37.1 C38.2 | R116.2 67.27,14.44 67.33,14.49 | 67.1,14.49 67.74,15.13 U$3.C U$3.D 67.93,22.61 v68.59,23.26 | 68.56,42.31 68.56,43.55 v69.3,44.29 | C31.1 65.56,30.02
  Top 0.508: C27.2 70.63,50.88 v71.58,51.83 | C28.- 67.1,14.49
  Top 0.61: C34.1 61.55,10.12 61.48,10.18
  Top 0.762: U6.1 64.21,50.97 v64.28,51.04
  Top 1.016: 60.79,9.49 60.19,10.08 JP13.2 58.88,10.47 57.36,11.99 v57.36,46.91 v57.36,49.45 v57.36,51.99 57.36,54.15 v57.29,54.21 | 60.79,9.49 60.79,6.59 61.35,6.02 68.79,6.02 JP15.4 | C29.- 61.48,10.18 60.79,9.49
  Bottom 0.254: v61.29,32.33 61.26,32.36 v61.26,38.81
  Bottom 0.305: J3.P$2 67.8,55.77 J3.GND J3.ID | v69.3,44.29 69.3,44.55 69.27,44.59 69.27,47.3 69.75,47.77 BOOT5.3 | v67.53,28.02 67.53,27.6 67.69,27.43 67.69,24.13 68.56,23.26 v68.59,23.26
  Bottom 0.508: 71.74,53.26 71.58,53.1 v71.58,51.83 | 71.74,53.26 JP14.19 | BOOT5.3 BOOT4.3 69.75,52.54 70.47,53.26 71.74,53.26 | v57.29,54.21 58.04,54.21 58.36,54.53 61.23,54.53 J3.MT1 | 62.5,52.81 60.23,52.81 59.41,51.99 v57.36,51.99 | v57.36,49.45 59.41,49.45 60.99,51.04 v64.28,51.04 60.15,46.91 v57.36,46.91
  Bottom 0.762: v64.28,51.04 62.5,52.81 J3.MT1
  Bottom 1.27: J3.MT1 J3.P$1 J3.P$2 J3.MT2 JP14.20 JP14.19
  pour Top (rank 2): 54.75,58.18 78.25,58.18 78.25,4.84 54.75,4.84
  pour Bottom: 54.59,58.34 78.41,58.34 78.41,4.68 54.59,4.68
GND3  (via drill 0.35)
  Top 0.152: U7.35 35.37,67 36.61,68.24 36.61,68.86 33.89,71.58 33.48,71.58 32.84,72.22 | 32.84,72.22 U7.23 | 32.84,72.22 32.99,72.22 34.6,73.82 35.14,73.82 35.55,73.41 35.55,73.34 36.36,72.54 37.59,72.54 37.91,72.87 37.91,73.48 38,73.57 38,73.82 U7.8
  Top 0.203: 39.8,75.63 40.45,75.63 41.56,74.52 41.7,74.52 C45.1 | v44.98,72.53 44.7,72.25 44.7,71.42 43.85,70.56 42.98,70.56
  Top 0.254: U7.8 39.8,75.63 | U7.47 42.07,69.35 42.51,69.35 42.94,69.78 C44.1 | U7.35 34.68,66.26 v34.19,66.26 | 40.57,66.29 C46.1 | v40.67,66.29 40.57,66.29 | 40.57,66.29
  Top 0.305: U7.23 31.49,73.57 30.69,73.57 | 30.69,73.57 30.54,73.41 C43.1 | JP21.4 65.46,76.42 64.19,77.69 61.21,77.69 C50.1 C51.2 | R155.2 58.56,72.27 58.51,72.33 | 58.51,72.11 57.87,72.74 U$4.C U$4.D 50.4,72.93 v49.74,73.59 | 30.69,73.57 29.45,73.57 v28.71,74.31 | C44.1 42.98,70.56
  Top 0.508: C40.2 22.12,75.63 v21.17,76.58 | C41.- 58.51,72.11
  Top 0.61: C47.1 62.88,66.55 62.81,66.49
  Top 0.762: U8.1 22.03,69.21 v21.96,69.28
  Top 1.016: 63.51,65.79 62.92,65.19 JP19.2 62.53,63.88 61.01,62.36 v26.09,62.36 v23.55,62.36 v21.01,62.36 18.85,62.36 v18.79,62.3 | 63.51,65.79 66.41,65.79 66.98,66.36 66.98,73.79 JP21.4 | C42.- 62.81,66.49 63.51,65.79
  Bottom 0.254: v40.67,66.29 40.64,66.26 v34.19,66.26
  Bottom 0.305: J4.P$2 17.23,72.8 J4.GND J4.ID | v28.71,74.31 28.45,74.31 28.41,74.27 25.7,74.27 25.23,74.75 BOOT7.3 | v44.98,72.53 45.4,72.53 45.56,72.69 48.87,72.69 49.74,73.56 v49.74,73.59
  Bottom 0.508: 19.74,76.74 19.9,76.58 v21.17,76.58 | 19.74,76.74 JP20.19 | BOOT7.3 BOOT6.3 20.46,74.75 19.74,75.47 19.74,76.74 | v18.79,62.3 18.79,63.04 18.47,63.36 18.47,66.23 J4.MT1 | 20.19,67.5 20.19,65.23 21.01,64.41 v21.01,62.36 | v23.55,62.36 23.55,64.41 21.96,65.99 v21.96,69.28 26.09,65.15 v26.09,62.36
  Bottom 0.762: v21.96,69.28 20.19,67.5 J4.MT1
  Bottom 1.27: J4.MT1 J4.P$1 J4.P$2 J4.MT2 JP20.20 JP20.19
  pour Top (rank 2): 14.82,59.75 14.82,83.25 68.16,83.25 68.16,59.75
  pour Bottom: 14.66,59.6 14.66,83.41 68.32,83.41 68.32,59.6
N$1  (via drill 0.35)
  Top 0.254: R33.2 18.09,47.23 17.93,47.39 17.93,51.51 18.51,52.09 v20.69,52.09
  Bottom 0.254: BOOT0.2 20.79,51.99 v20.69,52.09
N$2  (via drill 0.35)
  Top 0.254: v20.95,47.55 20.18,46.77 R34.1
  Bottom 0.254: v20.95,47.55 20.79,47.55 BOOT1.2
N$3
  Top 0.254: U1.18 21.02,40.42 R1.1
N$4
  Top 0.254: U1.19 21.11,41.22 21.11,42.31 21.45,42.65 R2.1
N$5
  Top 0.305: C10.2 20.56,21.87 C9.1
N$6  (via drill 0.3 pad 0.45)
  Top 0.203: R4.1 12.31,28.42 12.31,28.1 13.01,27.4 13.01,26.75 12.95,26.75 v12.37,26.16 | U1.39 13.24,35.48 14.51,35.48 14.86,35.83 14.86,36.78 15.29,37.22 v15.45,37.22
  Bottom 0.152: v15.45,37.22 16.02,36.65 16.02,36.11 14.55,34.64 14.55,32.25 14.28,31.98 14.28,29.48 14.41,29.36 14.41,27.89 12.68,26.16 v12.37,26.16
N$7  (via drill 0.3 pad 0.45)
  Top 0.203: R5.1 11.76,27.58 v12.36,26.99 | U1.40 13.51,35.04 14.57,35.04 15.42,35.89 v15.42,36.4
  Bottom 0.152: v12.36,26.99 12.85,27.48 13.1,27.48 14.11,28.49 14.11,29.23 13.96,29.37 13.96,32.09 14.25,32.37 14.25,35.23 v15.42,36.4
N$8  (via drill 0.3 pad 0.45)
  Top 0.203: v12.13,25.12 12.13,25.6 11.11,26.61 R6.1 | U1.41 13.86,34.69 15.1,34.69 v15.1,34.39
  Bottom 0.152: v12.13,25.12 12.99,25.99 14.04,25.99 14.72,26.66 14.72,29.47 14.6,29.59 14.6,31.86 14.85,32.12 14.85,34.14 v15.1,34.39
N$9
  Top 0.152: R7.1 10.95,24.55 12.43,24.55 12.88,25 12.88,26.02 13.74,26.87 13.74,29.32 13.09,29.97 13.09,31.8 12.71,32.18 12.71,32.82 U1.42
N$10
  Top 0.152: 10.79,22.39 13.19,24.78 13.19,25.89 14.04,26.75 14.04,29.44 13.39,30.09 13.39,31.92 13.01,32.3 13.01,32.42 U1.43
  Top 0.203: 10.79,22.39 R8.1
N$11
  Top 0.152: R9.1 11.42,20.58 11.42,22.52 13.53,24.62 13.53,25.77 14.35,26.6 14.35,29.56 13.69,30.22 13.69,31.69 U1.45
N$12
  Top 0.152: R10.1 11.39,18.32 11.39,20.05 11.77,20.44 11.77,22.4 13.84,24.47 13.84,25.65 14.66,26.47 14.66,29.68 14,30.34 14,31.28 U1.46
N$13
  Top 0.254: U1.21 20.15,41.68 20.15,43.58 21.45,44.87 R11.1
N$14
  Top 0.254: U1.22 19.68,41.91 19.68,43.73 21.26,45.32 21.26,45.96 21.4,46.09 R12.1
N$15
  Top 0.254: U1.25 14.91,41.74 14.91,46.85 13.29,48.48 13.29,53.14 11.45,54.98 R13.1
N$16